# EAGLE board FT6AP4PIN238K3C (EAGLE 7.5.0)
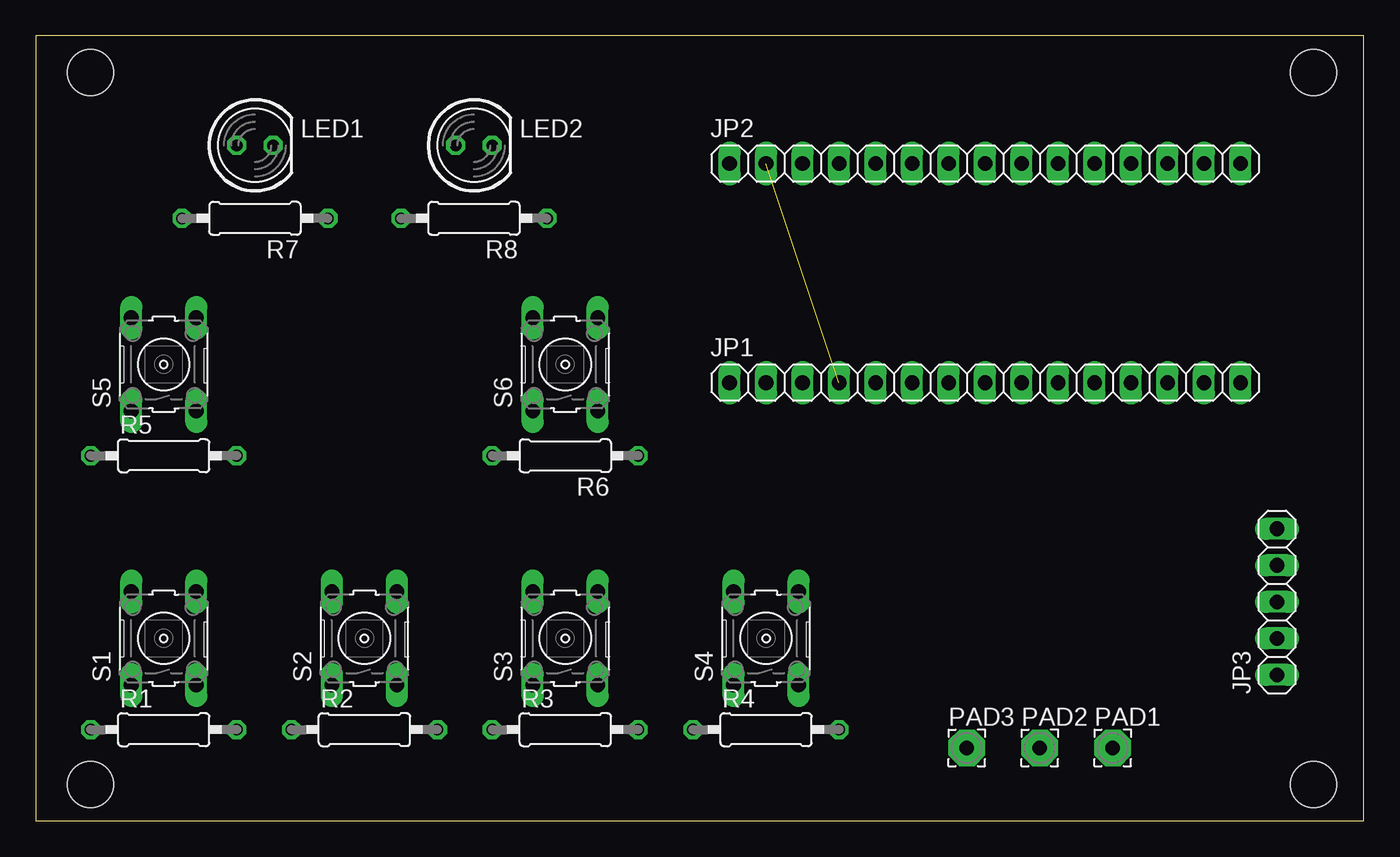
[diagram p0: board, top side]
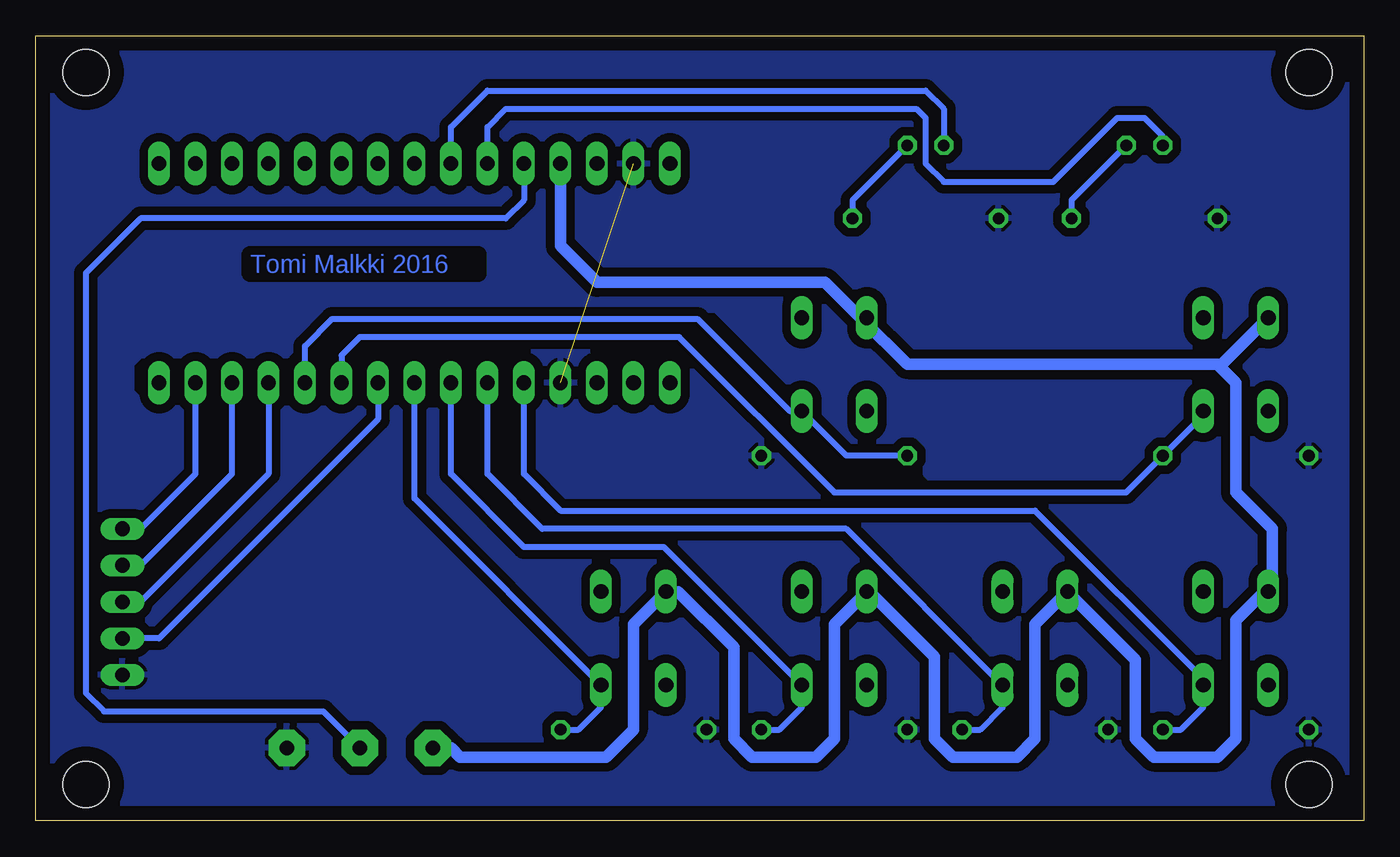
[diagram p1: board, bottom side, seen from below]

Size 92.38 x 54.6 mm. Coordinates in mm from the lower left corner, seen from the top.
Outline: 0,0 92.38,0 92.38,54.6 0,54.6 0,0
Copper layers (1*16): Top 0.035mm / dielectric 1.5mm / Bottom 0.035mm
Design rules "default": minimum track width 10mil, minimum drill 24mil, track to track 8mil, track to pad 8mil, pad to pad 8mil, via to via 8mil, smd to smd 8mil, copper to edge 40mil, drill to drill 8mil, minimum pad ring 10mil, minimum via ring 8mil, stop-mask expansion 4mil, vias tented up to drill 0mil, thermal gap 10mil
Holes 3.2 mm at 3.81,52.07 88.9,52.07 88.9,2.54 3.81,2.54

## Footprints (pad centres in the part's own frame; a part is rotated, then mirrored left to right if it is on the bottom)
1X15 = drill 1.016 long: 1 -17.78,0; 2 -15.24,0; 3 -12.7,0; 4 -10.16,0; 5 -7.62,0; 6 -5.08,0; 7 -2.54,0; 8 0,0; 9 2.54,0; 10 5.08,0; 11 7.62,0; 12 10.16,0; 13 12.7,0; 14 15.24,0; 15 17.78,0
1X05 = drill 1.016 long: 1 -5.08,0; 2 -2.54,0; 3 0,0; 4 2.54,0; 5 5.08,0
LED5MM = drill 0.813 octagon: A -1.27,0; K 1.27,0
2,54/1,0 = drill 1.016 pad 2.54 octagon: 1 0,0
0207/10 = drill 0.813 octagon: 1 -5.08,0; 2 5.08,0
B3F-10XX = drill 1.016 long: 1 -3.251,2.261; 2 3.251,2.261; 3 -3.251,-2.261; 4 3.251,-2.261

## Placement (x,y rotation side)
JP1  [1X15]  66.04,30.48 0 top
JP2  [1X15]  66.04,45.72 0 top
JP3  [1X05]  86.36,15.24 90 top
LED1  [LED5MM]  15.24,46.99 0 top
LED2  [LED5MM]  30.48,46.99 0 top
PAD1  [2,54/1,0]  74.93,5.08 0 top
PAD2  [2,54/1,0]  69.85,5.08 0 top
PAD3  [2,54/1,0]  64.77,5.08 0 top
R1  [0207/10]  8.89,6.35 0 top
R2  [0207/10]  22.86,6.35 0 top
R3  [0207/10]  36.83,6.35 0 top
R4  [0207/10]  50.8,6.35 0 top
R5  [0207/10]  8.89,25.4 0 top
R6  [0207/10]  36.83,25.4 180 top
R7  [0207/10]  15.24,41.91 180 top
R8  [0207/10]  30.48,41.91 180 top
S1  [B3F-10XX]  8.89,12.7 90 top
S2  [B3F-10XX]  22.86,12.7 90 top
S3  [B3F-10XX]  36.83,12.7 90 top
S4  [B3F-10XX]  50.8,12.7 90 top
S5  [B3F-10XX]  8.89,31.75 90 top
S6  [B3F-10XX]  36.83,31.75 90 top

## Library data of the parts
JP1-JP3 = pinhead
LED1 LED2 = led
PAD1-PAD3 = wirepad
R1-R8 = eagle-ltspice; SPICEMODEL: NONE; SPICEPREFIX: R
S1-S6 = switch-omron; MPN: B3F-1000; OC_FARNELL: 176432; OC_NEWARK: 36M3542

## Nets
GND: JP1.4 JP2.2 JP3.1 PAD1.1 R1.1 R2.1 R3.1 R4.1 R5.1 R6.1 R7.2 R8.2
N$2: LED1.K R7.1
N$3: LED2.K R8.1
POT: JP2.5 PAD2.1
RECLED: JP2.6 LED1.A
SERVO1: JP1.9 JP3.2
SERVO2: JP1.12 JP3.3
SERVO3: JP1.13 JP3.4
SERVO4: JP1.14 JP3.5
STARTLED: JP2.7 LED2.A
SW1: JP1.5 R1.2 S1.3
SW2: JP1.6 R2.2 S2.3
SW3: JP1.7 R3.2 S3.3
SW4: JP1.8 R4.2 S4.3
SWREC: JP1.10 R5.2 S5.3
SWSTART: JP1.11 R6.2 S6.3
VCC: JP2.4 PAD3.1 S1.2 S2.2 S3.2 S4.2 S5.2 S6.2

## Tracks (layer width: path | path; a pad name or v marks a point on that pad's centre or on a via)
GND  (1 unrouted)
  pour Bottom (isolate 0.61): 0,54.61 92.71,54.61 92.71,0 0,0
N$1
  pour Bottom (isolate 0.61): 12.7,30.48 31.75,30.48 38.1,36.83 53.34,36.83 56.52,40.01 56.52,43.18 57.15,43.82 59.69,41.27 84.45,41.27 88.27,37.47 88.27,21.59 85.09,21.59 81.92,24.77 81.92,29.21 85.09,29.21 85.72,29.84 85.72,31.75 85.09,32.38 74.93,32.38 71.75,35.56 45.09,35.56 35.56,26.04 31.12,26.04 30.48,25.4 30.48,24.13 29.84,23.5 17.14,23.5 12.06,28.58 12.06,30.48
N$2
  Bottom 0.406: LED1.K 20.32,43.18 R7.1
N$3
  Bottom 0.406: LED2.K 35.56,43.18 R8.1
N$4
  pour Bottom (isolate 0.61): 9.52,27.94 9.52,22.86 6.98,20.32 6.98,16.51 9.52,13.97 9.52,11.43 12.06,11.43 22.22,21.59 22.22,22.23 16.51,22.23 10.79,27.94
N$5
  pour Bottom (isolate 0.61): 22.86,20.95 34.92,20.95 34.92,20.32 34.92,19.69 26.03,10.8 23.49,10.8 23.49,13.97 20.95,16.51 20.32,16.51 15.24,11.43 15.24,6.98 12.7,6.98 11.43,8.26 11.43,9.52
N$6
  pour Bottom (isolate 0.61): 36.2,19.69 48.26,19.69 48.26,19.05 39.37,10.16 37.46,10.16 37.46,13.97 34.92,16.51 34.29,16.51 29.21,11.43 29.21,6.98 26.67,6.98 25.4,8.26 25.4,9.52 26.03,9.52
N$7
  pour Bottom (isolate 0.61): 48.89,18.41 48.89,16.51 51.44,13.97 51.44,12.07 52.07,11.43 53.98,11.43 54.61,11.43 65.41,22.23 65.41,28.58 64.14,28.58 64.14,24.13 58.42,18.41
N$8
  pour Bottom (isolate 0.61): 40.01,8.26 41.27,6.98 43.18,6.98 43.18,12.07 42.55,12.7 39.37,9.52 39.37,8.89
N$9
  pour Bottom (isolate 0.61): 69.22,29.21 75.56,29.21 75.56,24.13 85.09,14.61 85.09,13.34 83.82,13.34 69.22,27.94
POT
  Bottom 0.406: JP2.5 58.42,43.18 59.69,41.91 85.09,41.91 88.9,38.1 88.9,8.89 87.63,7.62 72.39,7.62 PAD2.1
RECLED
  Bottom 0.406: JP2.6 60.96,48.26 59.69,49.53 31.12,49.53 30.48,48.9 30.48,45.72 29.21,44.45 21.59,44.45 17.14,48.9 15.24,48.9 13.97,47.63 LED1.A
SERVO1
  Bottom 0.406: 85.09,12.7 JP3.2 83.82,12.7 68.58,27.94 JP1.9
SERVO2
  Bottom 0.406: JP1.12 76.2,24.13 85.09,15.24 JP3.3
SERVO3
  Bottom 0.406: JP3.4 85.09,17.78 78.74,24.13 JP1.13
SERVO4
  Bottom 0.406: JP3.5 85.09,20.32 81.28,24.13 JP1.14
STARTLED
  Bottom 0.406: JP2.7 63.5,48.26 60.96,50.8 30.48,50.8 29.21,49.53 LED2.A
SW1
  Bottom 0.406: JP1.5 58.42,24.13 55.88,21.59 22.86,21.59 11.15,9.88 S1.3 11.15,7.9 12.7,6.35 R1.2
SW2
  Bottom 0.406: 60.96,29.21 JP1.6 60.96,24.13 57.15,20.32 35.99,20.32 S2.3 25.12,7.9 26.67,6.35 R2.2
SW3
  Bottom 0.406: 63.5,29.21 JP1.7 63.5,24.13 58.42,19.05 48.69,19.05 S3.3 39.09,7.9 40.64,6.35 41.71,6.35 41.81,6.45 R3.2
SW4
  Bottom 0.406: JP1.8 66.04,22.43 S4.3 53.06,7.9 54.61,6.35 55.68,6.35 55.78,6.45 R4.2
SWREC
  Bottom 0.406: JP1.10 71.12,32.38 69.85,33.66 47.62,33.66 36.83,22.86 16.51,22.86 R5.2 11.15,28.22 S5.3
SWSTART
  Bottom 0.406: JP1.11 73.66,33.02 71.75,34.93 46.35,34.93 39.93,28.5 S6.3 35.99,25.4 R6.2
VCC
  Bottom 0.406: 6.91,15.95 S1.2 6.35,16.23 | 34.37,15.95 S3.2 | 47.7,15.95 S4.2 | 9.88,31.75 10.16,31.75 | S6.2 34.65,34.93 34.92,34.93
  Bottom 0.813: 6.91,15.95 8.89,13.97 8.89,5.71 10.16,4.45 14.61,4.45 15.88,5.71 15.88,11.23 S2.2 22.86,13.69 22.86,5.71 24.13,4.45 28.58,4.45 29.84,5.71 29.84,11.43 34.37,15.95 | S3.2 36.83,13.69 36.83,5.71 38.1,4.45 42.55,4.45 43.81,5.71 43.81,12.07 47.7,15.95 | S4.2 50.8,13.69 50.8,6.35 52.7,4.45 62.86,4.45 63.5,5.08 PAD3.1 | S5.2 9.88,31.75 | JP2.4 55.88,40.01 53.34,37.47 37.46,37.47 34.92,34.93 31.75,31.75 10.16,31.75 8.89,30.48 8.89,22.86 6.35,20.32 6.35,16.23

## Text on the board
Bottom: Tomi Malkki 2016